# Altium PCB DualHBridge.PcbDoc
Units mm, origin at the board's own origin, x right, y up, seen from the top; angles counter-clockwise.
Board outline 119 x 45 mm, 2 copper layers (Top Layer, Bottom Layer); 32 components, 23 nets, 106 pads, 0 vias.
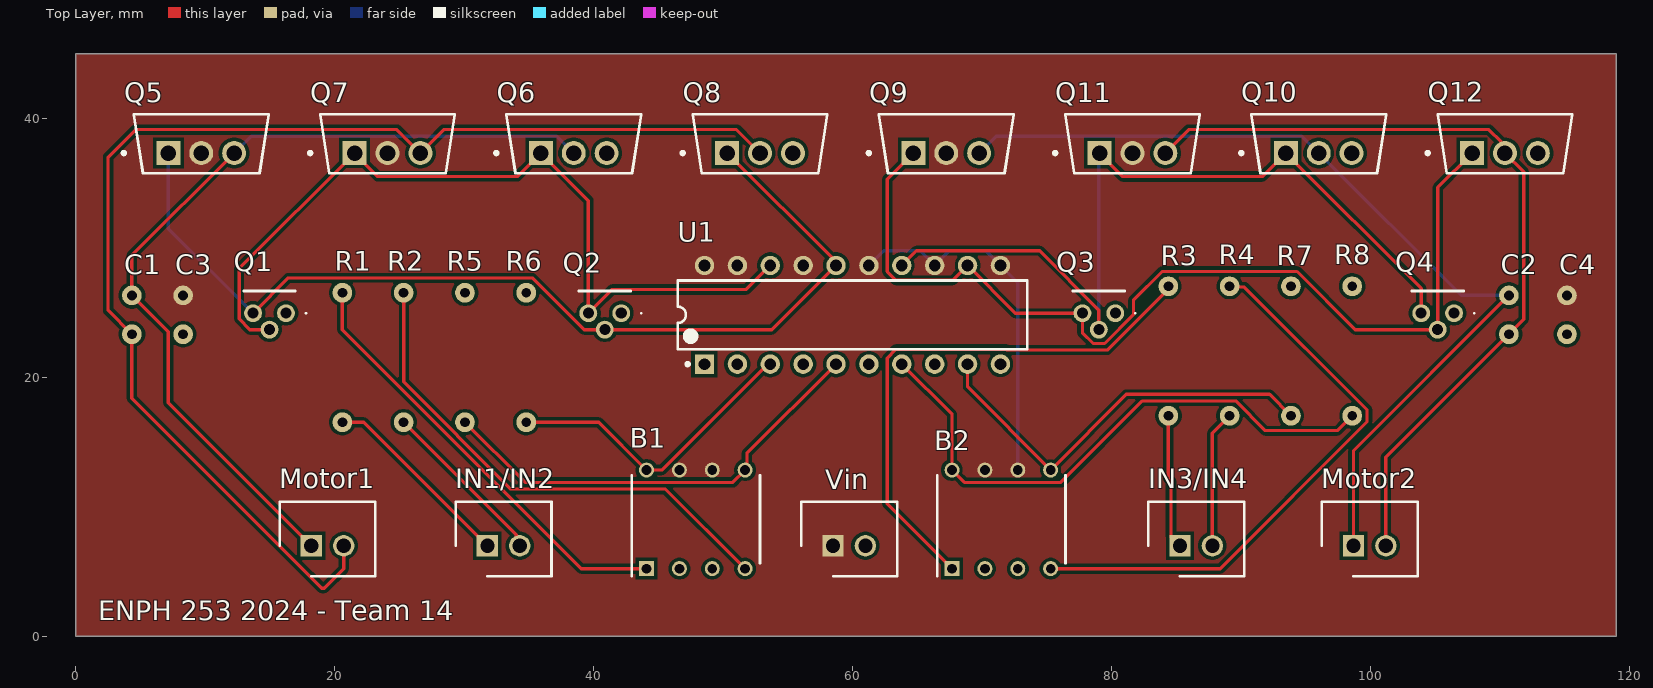
[diagram p0: Top Layer view]
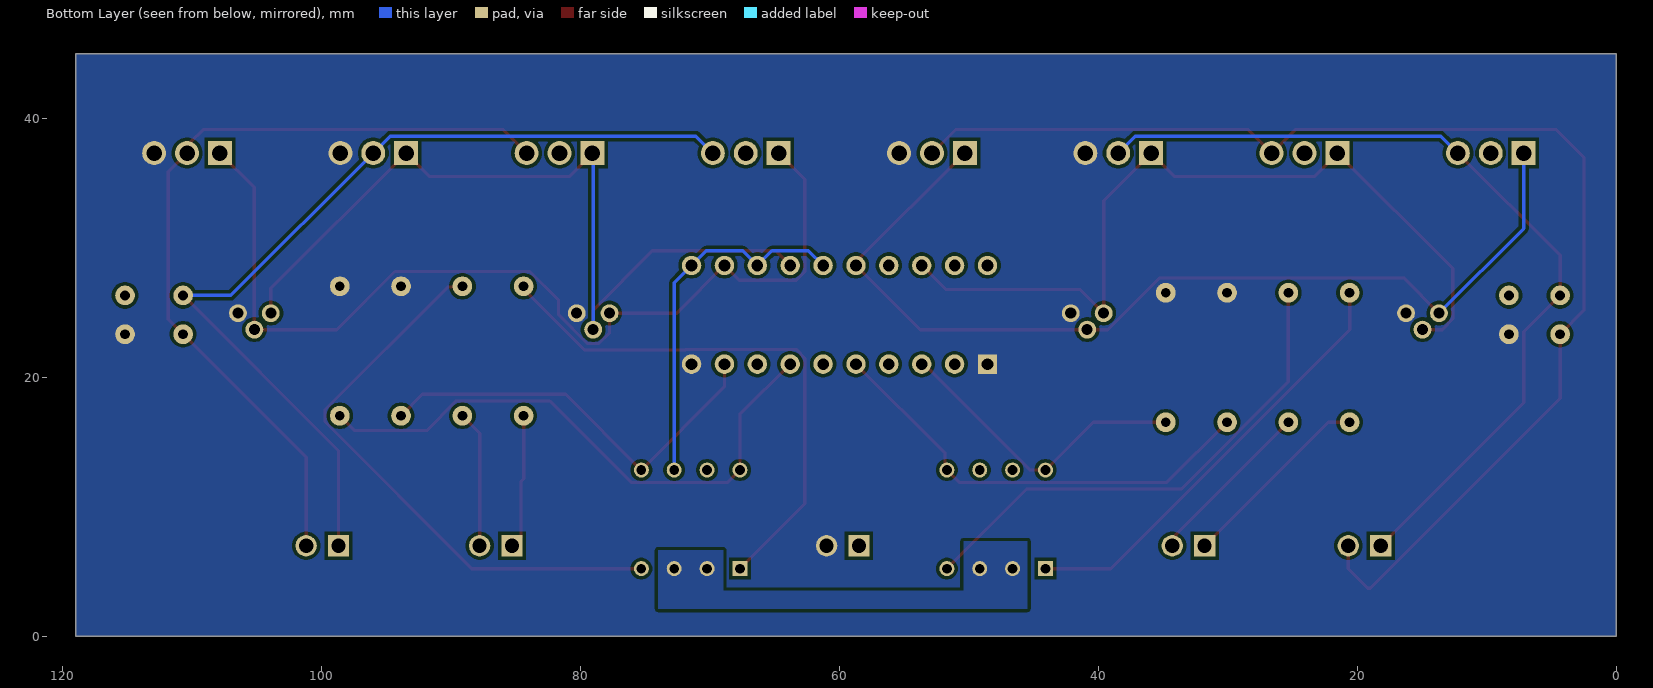
[diagram p1: Bottom Layer view, seen from below]

## Layer stack, top to bottom
Top Solder: solder mask 0.0102, Solder Resist, Dk 3.5
Top Layer: signal copper 0.0356
Dielectric 1: dielectric 0.32, FR-4, Dk 4.8
Bottom Layer: signal copper 0.0356
Bottom Solder: solder mask 0.0102, Solder Resist, Dk 3.5

## Board outline
0,0 119,0 119,45 0,45

## Design rules (kind name [scope] priority, off if disabled: settings)
Clearance [All] p1: gap=0.254 ignorepadtopadclearanceinfootprint=FALSE except(0: Arc-Hole Track-Hole SMDPad-Hole THPad-Hole Via-Hole Fill-Hole Poly-Hole Region-Hole Text-Hole)
PolygonConnect [All] p1: connectstyle=Direct reliefconductorwidth=0.254 reliefentries=4 polygonreliefangle="90 Angle" airgapwidth=0.254
RoutingVias [All] p1: holewidth=0.711 width=1.27 viastyle="Through Hole" minholewidth=0.711 minwidth=1.27 maxholewidth=0.711 maxwidth=1.27
SolderMaskExpansion [All] p1: expansion=0.102 istentingtop=FALSE
Width [All] p1: maxlimit=0.254 minlimit=0.254 preferedwidth=0.254
30 further rules are at their usual default settings.

## Components (designator, comment, footprint, x,y, rotation, side; value= is the part's Value field where it differs from the comment)
B1 "MCT6" DIP762W56P254L977H381Q8N 47.9,9.031 r90 top
B2 "MCT6" DIP762W56P254L977H381Q8N 71.5,9.031 r90 top
C1 "100nF" CAPACITOR 4.339,24.831 r90 top
C2 "100nF" CAPACITOR 110.7,24.831 r90 top
C3 "100nF" CAPACITOR 8.3,24.831 r90 top
C4 "100pF" CAPACITOR 115.186,24.831 r90 top
IN1/IN2 "Header" SHDR2W64P0X250_1X2_740X575X700P 31.8,6.99 r0 top
IN3/IN4 "Header" SHDR2W64P0X250_1X2_740X575X700P 85.3,6.99 r0 top
Motor1 "Header" SHDR2W64P0X250_1X2_740X575X700P 18.2,6.99 r0 top
Motor2 "Header" SHDR2W64P0X250_1X2_740X575X700P 98.7,6.99 r0 top
Q1 "VN2222LL-G" VN2222LLG 16.24,24.955 r180 top
Q2 "VN2222LL-G" VN2222LLG 42.14,24.955 r180 top
Q3 "VN2222LL-G" VN2222LLG 80.3,24.955 r180 top
Q4 "VN2222LL-G" VN2222LLG 106.47,24.955 r180 top
Q5 "IRFZ44VPBF" FP-PG-TO220-3-MFG 9.7,38.031 r90 top
Q6 "IRFZ44VPBF" FP-PG-TO220-3-MFG 38.471,38.031 r90 top
Q7 "IRFZ44VPBF" FP-PG-TO220-3-MFG 24.086,38.031 r90 top
Q8 "IRFZ44VPBF" FP-PG-TO220-3-MFG 52.857,38.031 r90 top
Q9 "IRFZ44VPBF" FP-PG-TO220-3-MFG 67.243,38.031 r90 top
Q10 "IRFZ44VPBF" FP-PG-TO220-3-MFG 96.014,38.031 r90 top
Q11 "IRFZ44VPBF" FP-PG-TO220-3-MFG 81.629,38.031 r90 top
Q12 "IRFZ44VPBF" FP-PG-TO220-3-MFG 110.4,38.031 r90 top
R1 "Resistor 330R +/-5 % 0402 63 mW" RESISTOR 20.6,21.533 r90 top
R2 "Resistor 330R +/-5 % 0402 63 mW" RESISTOR 25.333,21.533 r90 top
R3 "Resistor 330R +/-5 % 0402 63 mW" RESISTOR 84.4,22.033 r90 top
R4 "Resistor 330R +/-5 % 0402 63 mW" RESISTOR 89.133,22.033 r90 top
R5 "Resistor 1k +/-1% 1206 250 mW" RESISTOR 30.067,21.533 r90 top
R6 "Resistor 1k +/-1% 1206 250 mW" RESISTOR 34.8,21.533 r90 top
R7 "Resistor 1k +/-1% 1206 250 mW" RESISTOR 93.867,22.033 r90 top
R8 "Resistor 1k +/-1% 1206 250 mW" RESISTOR 98.6,22.033 r90 top
U1 "LT1161IN#PBF" LT-N-20 60,24.831 r90 top
Vin "Header" SHDR2W64P0X250_1X2_740X575X700P 58.5,6.99 r0 top

## Footprints (in the part's own frame and the unit in brackets; to place one, negate y for a bottom-side part, rotate by r counter-clockwise, add the part's x,y. Pads: shape width x height; smd on the part's side, far side on the other; paste and mask are expansions set on the pad)
CAPACITOR [mil]
  round 60 hole 30: 1(-59.06,0) 1(59.06,0)
DIP762W56P254L977H381Q8N [mm]
  rect 1.16x1.16 / inner round 1.16 / far side rect 1.16x1.16 hole 0.76: 1(-3.81,3.81)
  round 1.16 hole 0.76: 2(-3.81,1.27) 3(-3.81,-1.27) 4(-3.81,-3.81) 5(3.81,-3.81) 6(3.81,-1.27) 7(3.81,1.27) 8(3.81,3.81)
  silkscreen extent -4.39,-4.95 3.41,4.95
FP-PG-TO220-3-MFG [mm]
  rect 1.85x1.85 hole 1.2 paste-1000 mask+0: 1(-0.705,2.54)
  round 1.85 hole 1.2 paste-1000 mask+0: 2(-0.705,0) 3(-0.705,-2.54)
  silkscreen extent -2.28,-5.2 2.27,6.1, body extent -2.37,-5.55 2.37,5.55, height 0.25
LT-N-20 [mm] "DIP, 20-Leads, Body 26.924x6.477mm, Pitch 2.54mm"
  rect 1.5x1.5 hole 0.9: 1(-3.81,11.43)
  round 1.5 hole 0.9: 2(-3.81,8.89) 3(-3.81,6.35) 4(-3.81,3.81) 5(-3.81,1.27) 6(-3.81,-1.27) 7(-3.81,-3.81) 8(-3.81,-6.35) 9(-3.81,-8.89) 10(-3.81,-11.43) 11(3.81,-11.43) 12(3.81,-8.89) 13(3.81,-6.35) 14(3.81,-3.81) 15(3.81,-1.27) 16(3.81,1.27) 17(3.81,3.81) 18(3.81,6.35) 19(3.81,8.89) 20(3.81,11.43)
  silkscreen extent -3.93,-13.5 2.65,13.5, body extent -3.95,-13.45 3.95,13.45, height 4.2
RESISTOR [mil]
  round 60 hole 30: 1(-196.85,0) 2(196.85,0)
SHDR2W64P0X250_1X2_740X575X700P [mm]
  rect 1.65x1.65 / inner round 1.65 / far side rect 1.65x1.65 hole 1.1: 1(0,0)
  round 1.65 hole 1.1: 2(2.5,0)
  silkscreen extent -2.45,-2.35 4.95,3.4
VN2222LLG [mm]
  round 1.381 hole 0.85: 1(0,0) 2(1.27,1.27) 3(2.54,0)
  silkscreen extent -1.6,-1.71 3.27,0.05

## Part data
B1 B2: "Vishay, MCT6 DC Input Phototransistor Output Optocoupler, Through Hole, 8-Pin DIP", Manufacturer_Name=Vishay, Mouser Part Number=782-MCT6, Arrow Part Number=MCT6, Arrow Price/Stock=https://www.arrow.com/en/products/mct6/vishay?region=nac, Datasheet Link=http://www.vishay.com/docs/83645/mct6.pdf, Geometry.Height=3.81mm, Manufacturer_Part_Number=MCT6, Mouser Price/Stock=https://www.mouser.co.uk/ProductDetail/Vishay-Semiconductors/MCT6?qs=BUVUY%2Fo3jYXL%252B4Q07h%252BWzw%3D%3D
C1 C2 C3 C4: library part Capacitor
Q1 Q2 Q3 Q4: "Microchip VN2222LL-G N-channel MOSFET Transistor, 0.23 A, 60 V, 3-Pin TO-92", Manufacturer_Name=Microchip, Mouser Part Number=689-VN2222LL-G, Arrow Part Number=VN2222LL-G, Arrow Price/Stock=https://www.arrow.com/en/products/vn2222ll-g/microchip-technology?region=europe, Datasheet Link=http://www.microchip.com/mymicrochip/filehandler.aspx?ddocname=en571446, Geometry.Height=5.334mm, Manufacturer_Part_Number=VN2222LL-G, Mouser Price/Stock=https://www.mouser.co.uk/ProductDetail/Microchip-Technology/VN2222LL-G?qs=H6g4Fy%252BsDGemwmUTAFka1Q%3D%3D
Q5 Q6 Q7 Q8 Q9 Q10 Q11 Q12: library part CMP-32901-001154-1, "MOSFET N-CH 60V 55A TO220AB", Case/Package=TO-220, Continuous Drain Current (ID)=55A, Drain to Source Breakdown Voltage=60V, Drain to Source Resistance=16.5mR, Gate to Source Voltage (Vgs)=20V, Input Capacitance=1.812nF, Max Operating Temperature=175°C, Max Power Dissipation=115W, Min Operating Temperature=-55°C, Threshold Voltage=4V, Drain to Source Voltage (Vdss)=60V, Element Configuration=Single, Halogen Free="Halogen Free", Height=0.65inch, Lead Free="Lead Free", Length=0.42inch, Max Dual Supply Voltage=60V, Mount="Through Hole", Number of Pins=3, Packaging=Rail/Tube, Polarization=N, Power Dissipation=115W, Rds On Max=16.5mR, Reach SVHC Compliant=Yes, RoHS Compliant=Yes, Series=HEXFET®, Turn-Off Delay Time=40ns, Turn-On Delay Time=13ns, Width=0.19inch
R1 R2 R3 R4 R5 R6 R7 R8: library part Resistor
U1: library part CMP-0479-00309-1, "Quad Protected High-Side MOSFET Driver, 8 to 48 V Vin, 20-pin DIP (N-20), -40 to 85 degC, Pb-Free", Manufacturer="Linear Technology", ComponentLink1Description="Manufacturer URL", ComponentLink1URL=http://www.linear.com/, ComponentLink2Description=Datasheet, ComponentLink2URL=http://cds.linear.com/docs/en/datasheet/1161fa.pdf, ComponentLink3Description="Package Specification", ComponentLink3URL=http://cds.linear.com/docs/en/packaging/05081510_I_N20.pdf, DatasheetVersion="Rev. A", Mounting Technology="Through Hole", PackageDescription="20-Pin PDIP, Body 26.924 x 6.477 mm, Pitch 2.54 mm", PackageReference=N-20, PackageVersion="Rev. I, 07/2011", PartNumber=LT1161IN#PBF, RoHS=TRUE

## Nets (pads, with @x,y where several pads share a name; then routed paths per layer and width w, separated by ;. In a path a pad name is that pad's centre, name@x,y a point inside that pad or via, vN(x,y) a via of type N, cw(c..) or ccw(c..) an arc to the next point about the centre after c; other vN are vias at no path point)
GND: C3.1@8.3,23.331 C4.1@115.186,23.331 Q1.1 Q2.1 Q3.1 Q4.1 Q6.3 Q8.3 Q10.3 Q12.3 R5.2 R6.2 R7.2 R8.2 U1.1 U1.10 Vin.2
NetB1_1: B1.1 R1.2 | length 34
  Top Layer w0.254: R1.2 20.6,23.665 39.044,5.221 B1.1
NetB1_4: B1.4 R2.2 | length 39.2
  Top Layer w0.254: R2.2 25.333,19.65 33.611,11.372 45.559,11.372 B1.4
NetB1_5: B1.5 R5.1 U1.5 | length 35.1
  Top Layer w0.254: R5.1 34.72,11.88 50.749,11.88 B1.5 51.848,12.98 51.848,14.14 U1.5
NetB1_6: B1.6 B1.7 B2.6 B2.7 C3.1@8.3,26.331 C4.1@115.186,26.331 Q5.2 Q7.2 Q9.2 Q11.2 U1.11 U1.13 U1.15 U1.17 U1.19 U1.20 Vin.1 | length 28.4
  Bottom Layer w0.254: U1.15 62.401,29.772 65.219,29.772 U1.13 67.481,29.772 70.299,29.772 U1.11 72.77,27.301 B2.6
NetB1_8: B1.8 R6.1 U1.3 | length 23.8
  Top Layer w0.254: R6.1 40.398,16.533 B1.8 45.271,12.841 53.451,21.021 U1.3
NetB2_1: B2.1 R3.2 | length 42.5
  Top Layer w0.254: B2.1 62.679,10.232 62.679,21.49 63.342,22.152 71.898,22.152 71.945,22.106 79.684,22.106 84.4,26.822 R3.2
NetB2_4: B2.4 R4.2 | length 44.6
  Top Layer w0.254: B2.4 88.404,5.221 99.743,16.56 99.743,17.507 90.276,26.973 89.193,26.973 R4.2
NetB2_5: B2.5 R7.1 U1.9 | length 32.5
  Top Layer w0.254: U1.9 68.89,19.261 B2.5 81.153,18.684 92.216,18.684 R7.1
NetB2_8: B2.8 R8.1 U1.7 | length 45.1
  Top Layer w0.254: U1.7 67.69,17.141 B2.8 68.651,11.88 76.104,11.88 82.4,18.176 89.607,18.176 91.893,15.89 97.457,15.89 R8.1
NetC1_1: C1.1@4.339,26.331 Motor1.1 Q5.3 Q6.2 | length 66.7
  Top Layer w0.254: Q5.3 4.339,29.425 4.339,26.331 7.157,23.513 7.157,18.033 Motor1.1
  Bottom Layer w0.254: Q5.3 13.546,38.632 37.165,38.632 Q6.2
NetC1_2: C1.1@4.339,23.331 Motor1.2 Q7.3 Q8.2 | length 97.7
  Top Layer w0.254: Motor1.2 20.7,5.2 19.21,3.71 19,3.71 4.339,18.372 4.339,23.331 2.5,25.17 2.5,37 4.64,39.14 24.812,39.14 Q7.3 28.44,39.14 51.043,39.14 Q8.2
NetC2_1: C2.1@110.7,26.331 Motor2.1 Q9.3 Q10.2 | length 70.9
  Top Layer w0.254: Motor2.1 98.7,14.331 C2.1@110.7,26.331
  Bottom Layer w0.254: Q9.3 71.089,38.632 94.708,38.632 Q10.2 107.009,26.331 C2.1@110.7,26.331
NetC2_2: C2.1@110.7,23.331 Motor2.2 Q11.3 Q12.2 | length 63.4
  Top Layer w0.254: Q11.3 85.983,39.14 109.153,39.14 110.095,38.199 110.095,37.632 Q12.2 111.843,35.883 111.843,24.474 110.7,23.331 101.2,13.831 Motor2.2
NetIN1/IN2_1: IN1/IN2.1 R1.1 | length 15.2
  Top Layer w0.254: R1.1 22.256,16.533 IN1/IN2.1
NetIN1/IN2_2: IN1/IN2.2 R2.1 | length 13.3
  Top Layer w0.254: R2.1 34.033,7.834 34.033,7.257 IN1/IN2.2
NetIN3/IN4_1: IN3/IN4.1 R3.1 | length 10.4
  Top Layer w0.254: R3.1 84.4,12.168 84.602,11.966 84.602,7.688 IN3/IN4.1
NetIN3/IN4_2: IN3/IN4.2 R4.1 | length 10.6
  Top Layer w0.254: IN3/IN4.2 87.8,15.7 R4.1
NetQ1_2: Q1.2 Q2.3 Q6.1 Q7.1 U1.18 | length 64.6
  Top Layer w0.254: Q1.2 13.455,23.685 12.629,24.512 12.629,28.409 Q7.1 22.344,36.528 22.344,36.503 23.334,35.512 34.118,35.512 Q6.1 39.6,33.658 Q2.3 41.432,26.787 51.796,26.787 U1.18
NetQ1_3: Q1.3 Q2.2 Q5.1 Q8.1 U1.16 | length 77.1
  Top Layer w0.254: Q1.3 16.421,27.676 35.273,27.676 39.264,23.685 Q2.2 53.774,23.685 U1.16 58.73,28.914 Q8.1
  Bottom Layer w0.254: Q5.1 7.16,31.495 Q1.3
NetQ3_2: Q3.2 Q4.3 Q10.1 Q11.1 U1.14 | length 65.4
  Top Layer w0.254: U1.14 64.941,29.772 74.458,29.772 79.03,25.201 Q3.2 ; Q11.1 79.887,36.528 79.887,36.503 80.877,35.512 91.66,35.512 Q10.1 103.93,26.871 Q4.3
  Bottom Layer w0.254: Q3.2 79.03,37.268 Q11.1
NetQ3_3: Q3.3 Q4.2 Q9.1 Q12.1 U1.12 | length 76.2
  Top Layer w0.254: Q9.1 62.679,35.303 62.679,28.173 63.342,27.51 67.759,27.51 U1.12 72.576,24.955 Q3.3 77.76,23.44 78.586,22.614 79.474,22.614 81.7,24.84 81.7,25.95 83.927,28.176 94.34,28.176 98.831,23.685 Q4.2 105.2,34.666 Q12.1
"Signal GND": B1.2 B1.3 B2.2 B2.3
pads on no net: U1.2 U1.4 U1.6 U1.8

## Polygon pours and split planes (outlines as drawn)
GND on Bottom Layer "GND_L02_P004" (solid, pour order 4): 0,45 0,0 119,0 119,45
"Signal GND" on Bottom Layer "SIGNAL_GND_L02_P000" (solid, pour order 0): 45.5,2.131 45.5,7.331 50.4,7.331 50.4,3.5 69,3.5 69,6.631 74,6.631 74,2.131
NetB1_6 on Top Layer "NETB1_6_L01_P003" (solid, pour order 3): 0,45 0,0 119,0 119,45

## Silkscreen, mask and mechanical layers (free items; w line width, h text height)
Top Overlay:
  text "ENPH 253 2024 - Team 14" at 1.754,1.254 h1.52